# EAGLE board MOD-v2-3_MOD-Strips (EAGLE 8.3.2)

Size 52 x 31.07 mm. Coordinates in mm from the lower left corner, seen from the top.
Outline: 0,3.03 arc90 3.81,0.03 47.99,0.03 arc90 52,3.03 52,28.03 arc90 47.99,31.03 3.81,31.03 arc90 0,28.03 0,3.03
Copper layers (1*16): Top 0.035mm / dielectric 1.5mm / Bottom 0.035mm
Design rules "default": minimum track width 6mil, minimum drill 0.35mm, track to track 6mil, track to pad 6mil, pad to pad 6mil, via to via 6mil, smd to smd 6mil, copper to edge 40mil, drill to drill 6mil, minimum pad ring 10mil, minimum via ring 8mil, stop-mask expansion 4mil, vias tented up to drill 0mil, thermal gap 10mil
Net classes: 0 default: width 0.254 mm, clearance 0.254 mm; 1 power: width 0.61 mm, clearance 0.61 mm; 3 Analog Sig: width 0.406 mm, clearance 0.406 mm
Holes 4 mm at 4,4.03 48,4.03 4,27.03 48,27.03

## Footprints (pad centres in the part's own frame; a part is rotated, then mirrored left to right if it is on the bottom)
1X03_NO_SILK = drill 1.016 pad 1.524: 1 0,0; 2 2.54,0; 3 5.08,0
POT_ALPHA_RD901F-40-(L)R1 = drill 0.9 pad 1.778: 1 -2.54,-7.5; 2 0,-7.5; 3 2.54,-7.5 | drill 1.8 pad 3: M1 -4.8,0; M2 4.8,0
LED3MM = drill 0.813 octagon: A -1.27,0; K 1.27,0
0204/7 = drill 0.813 octagon: 1 -3.81,0; 2 3.81,0
SWITCH_TR2-MOMENTARY-LED = drill 0.8 pad 1.676: 1 2.54,-2.54; 2 2.54,2.54; 3 -2.54,-2.54; 4 -2.54,2.54; A 0,2.54; C 0,-2.54 | hole 2.2: 2.53,0.05 | hole 1.05: -1.76,1.1; -1.76,-1.09
2X5-SHROUDED_LOCK = drill 1.016 pad 1.88: 1 -1.397,5.08; 2 1.397,5.08; 3 -1.397,2.54; 4 1.397,2.54; 5 -1.397,0; 6 1.397,0; 7 -1.397,-2.54; 8 1.397,-2.54; 9 -1.397,-5.08; 10 1.397,-5.08

## Placement (x,y rotation side)
AN-IN-1  [1X03_NO_SILK]  9.32,29.06 180 bottom
AN-IN-2  [1X03_NO_SILK]  37.66,29.06 180 bottom
KNOB1  [POT_ALPHA_RD901F-40-(L)R1]  8,17.03 0 top
KNOB2  [POT_ALPHA_RD901F-40-(L)R1]  44,17.03 0 top
LED1  [LED3MM]  26,17.03 0 top
R1  330  [0204/7]  19,16.03 90 bottom
R2  330  [0204/7]  33,16.03 270 bottom
R4  220  [0204/7]  26,6.03 90 bottom
S1  SW-LEDPTH  [SWITCH_TR2-MOMENTARY-LED]  19,5.03 0 top
S2  SW-LEDPTH  [SWITCH_TR2-MOMENTARY-LED]  33,5.03 0 top
STRIP-MOD  J1  [2X5-SHROUDED_LOCK]  26,26.43 90 bottom

## Library data of the parts
AN-IN-1 = SparkFun-Connectors; AN1: AN1; GND: GND; VCC: VCC
AN-IN-2 = SparkFun-Connectors; AN2: AN2; GND: GND; VCC: VCC
KNOB1 KNOB2 R1 R2 R4 S1 S2 = CMU-ArtFab
LED1 = led; GND: (-); V: (+)
STRIP-MOD = SparkFun-Connectors; PROD_ID: CONN-08671; SF_ID: PRT-08506

## Nets
+3V3: AN-IN-1.1 AN-IN-2.1 KNOB1.1 KNOB2.1 STRIP-MOD.9
AGND [Analog Sig]: AN-IN-1.3 AN-IN-2.3 KNOB1.3 KNOB2.3 STRIP-MOD.8
AN1 [Analog Sig]: AN-IN-1.2 KNOB1.2 STRIP-MOD.1
AN2 [Analog Sig]: AN-IN-2.2 KNOB2.2 STRIP-MOD.2
B1: S1.3 STRIP-MOD.3
B2: S2.3 STRIP-MOD.4
GND: LED1.K S1.1 S1.C S2.1 S2.C STRIP-MOD.10
LED1: R4.1 STRIP-MOD.7
N1: LED1.A R4.2
N$1: R1.1 S1.A
N$2: R2.1 S2.A
PWM_1 [power]: R1.2 STRIP-MOD.5
PWM_2 [power]: R2.2 STRIP-MOD.6

## Tracks (layer width: path | path; a pad name or v marks a point on that pad's centre or on a via)
+3V3  (4 unrouted)
AGND  (4 unrouted)
AN1  (2 unrouted)
AN2  (2 unrouted)
B1  (1 unrouted)
B2  (1 unrouted)
GND  (5 unrouted)
LED1  (1 unrouted)
N1  (1 unrouted)
N$1  (1 unrouted)
N$2  (1 unrouted)
PWM_1  (1 unrouted)
PWM_2  (1 unrouted)